# Altium PCB TSAL-LED_STRING.PcbDoc
Units mil, origin at the board's own origin, x right, y up, seen from the top; angles counter-clockwise.
Board outline 1870 x 850 mil, 2 copper layers (Top Layer, Bottom Layer); 9 components, 10 nets, 50 pads, 0 vias.
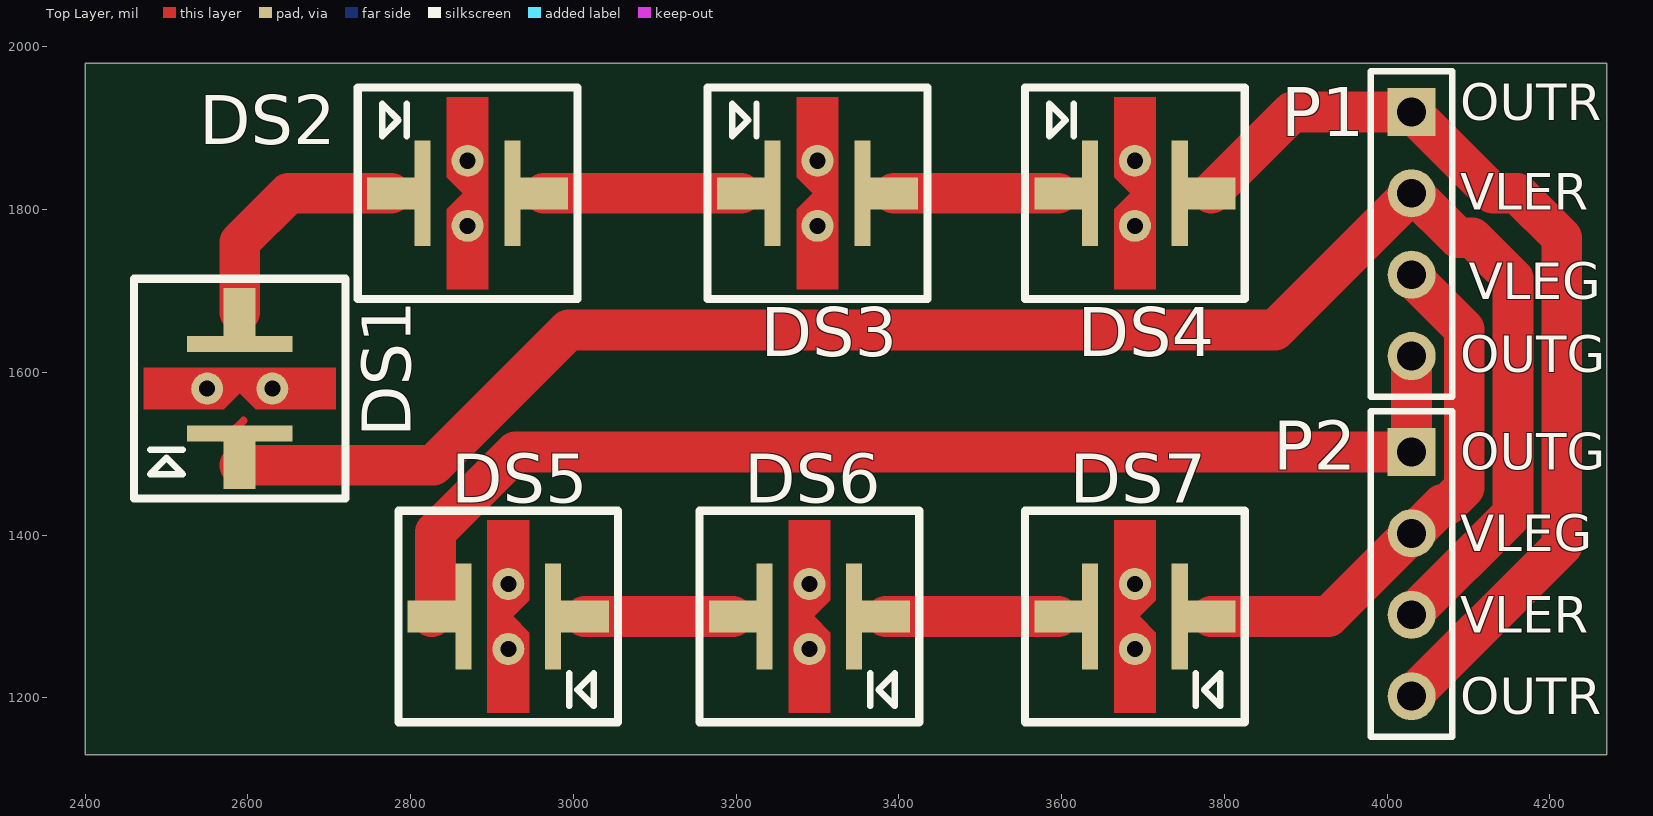
[diagram p0: Top Layer view]
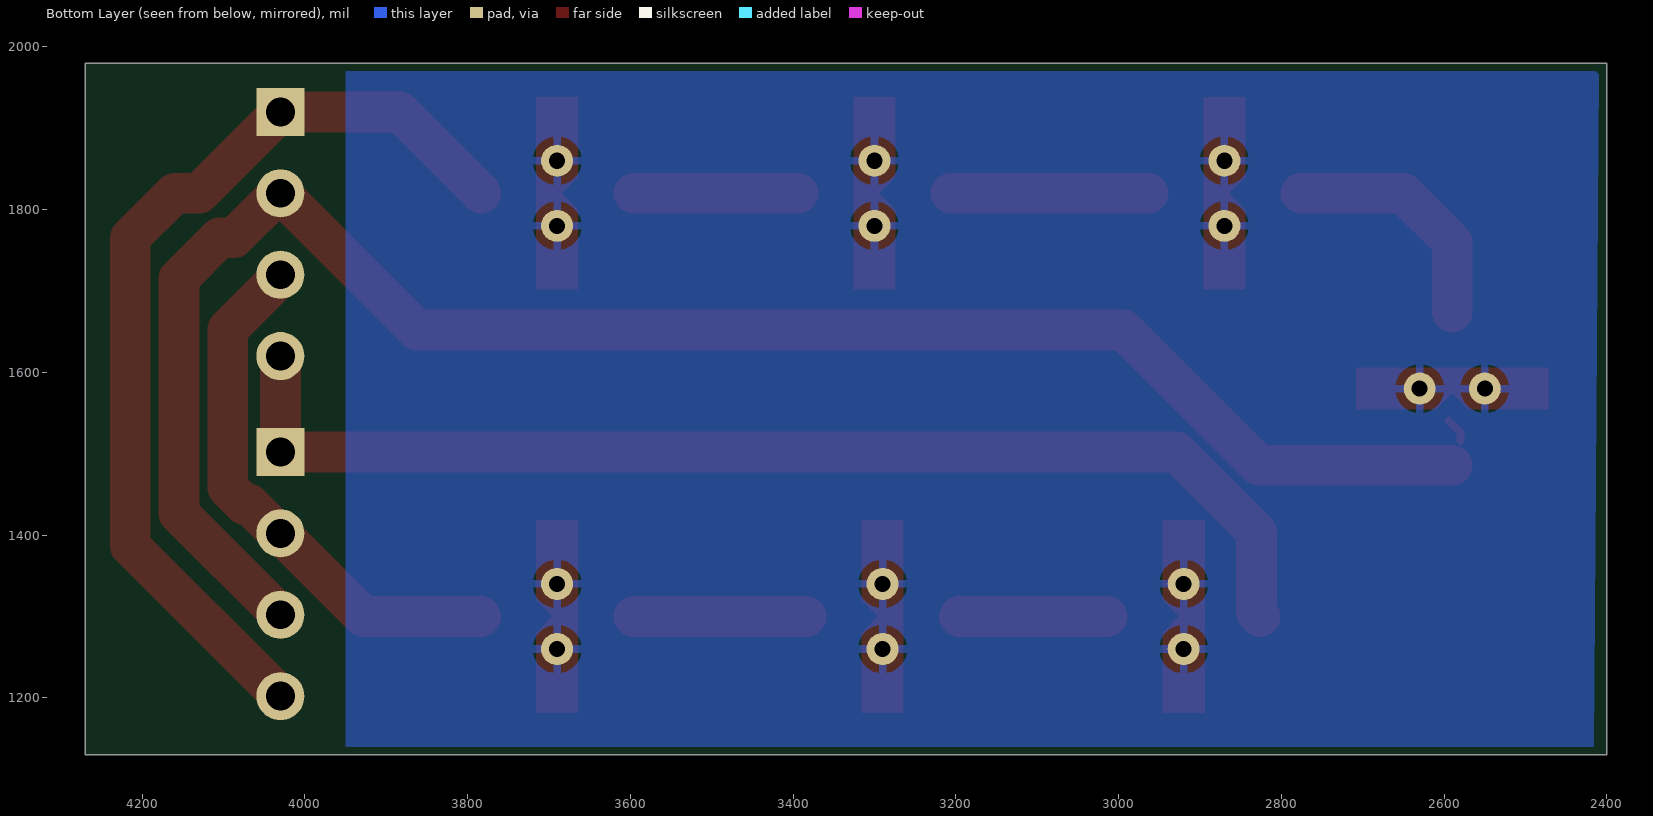
[diagram p1: Bottom Layer view, seen from below]
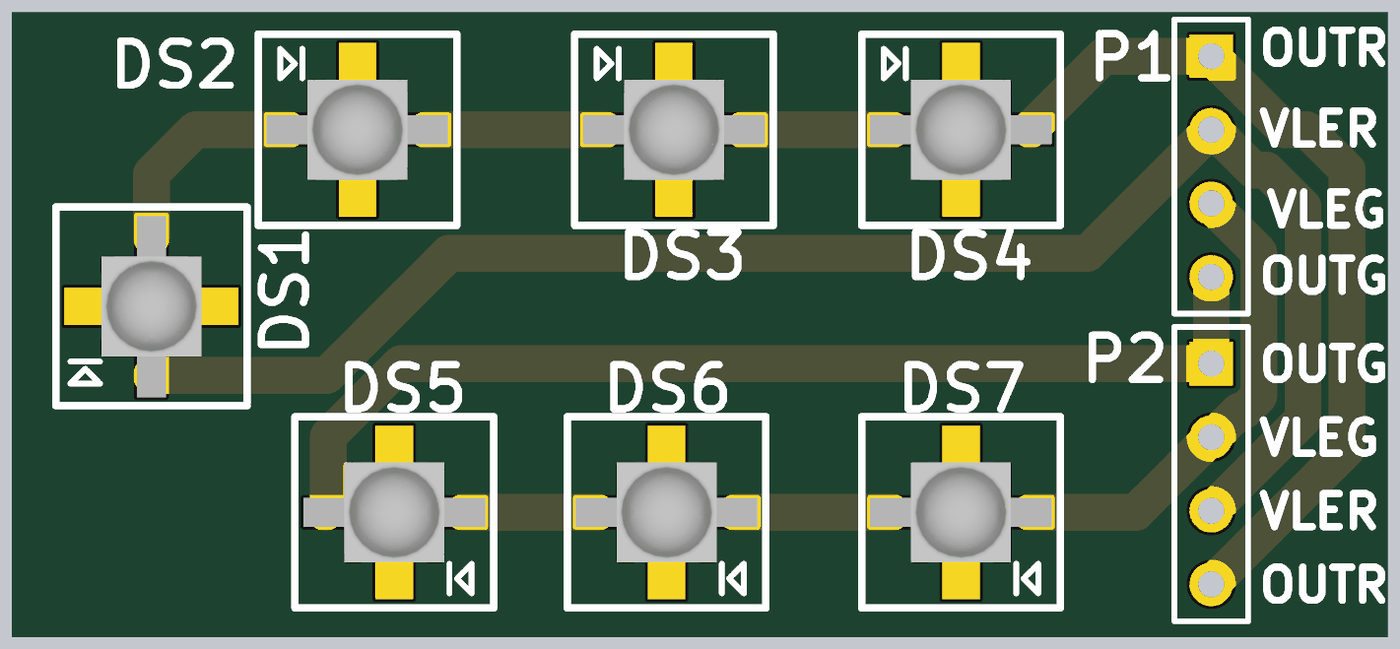
[diagram p2: 3D render of the assembled board from above, using the file's embedded part models]

## Layer stack, top to bottom
Top Solder: solder mask 0.4, Solder Resist, Dk 3.5
Top Layer: signal copper 1.4
Dielectric 1: dielectric 12.6, FR-4, Dk 4.8
Bottom Layer: signal copper 1.4
Bottom Solder: solder mask 0.4, Solder Resist, Dk 3.5

## Board outline
2400,1130 4270,1130 4270,1980 2400,1980

## Design rules (kind name [scope] priority, off if disabled: settings)
Clearance [All] p1: gap=10 ignorepadtopadclearanceinfootprint=FALSE except(0: Arc-Hole Track-Hole SMDPad-Hole THPad-Hole Via-Hole Fill-Hole Poly-Hole Region-Hole Text-Hole)
PolygonConnect [All] p1: connectstyle=Relief reliefconductorwidth=10 reliefentries=4 polygonreliefangle="90 Angle" airgapwidth=10
RoomDefinition "RED LEDs" [InComponentClass('RED LEDs')] p1: confinementstyle=ConfineIn formatcopy=TRUE lockcomponents=FALSE outline 7045,2030 8230,2030 8230,2380 7045,2380
RoomDefinition QUTMS-TSAL-LEDs [InComponentClass('QUTMS-TSAL-LEDs')] p2: confinementstyle=ConfineIn formatcopy=TRUE lockcomponents=FALSE outline 7045,1460 7165,1460 7165,1980 7045,1980
RoomDefinition "GREEN LEDs" [InComponentClass('GREEN LEDs')] p3: confinementstyle=ConfineIn formatcopy=TRUE lockcomponents=FALSE outline 7045,1060 7925,1060 7925,1410 7045,1410
RoutingVias [All] p1: holewidth=28 width=50 viastyle="Through Hole" minholewidth=28 minwidth=50 maxholewidth=28 maxwidth=50
SolderMaskExpansion [All] p1: expansion=4 istentingtop=FALSE
Width [All] p1: maxlimit=50 minlimit=10 preferedwidth=10 bottomlayer_maxwidth=10 minimp=50.000000 maximp=50.000000 favimp=50.000000
30 further rules are at their usual default settings.

## Classes and differential pairs
component class "RED LEDs": DS1 DS2 DS3 DS4
component class QUTMS-TSAL-LEDs: P1 P2
component class "GREEN LEDs": DS5 DS6 DS7

## Components (designator, comment, footprint, x,y, rotation, side; value= is the part's Value field where it differs from the comment)
DS1 "XPERED-L1-R250-00401" "Cree XLamp XP-E2 (red and green LED)" 2590,1580 r90 top
DS2 "XPERED-L1-R250-00401" "Cree XLamp XP-E2 (red and green LED)" 2870,1820 r0 top
DS3 "XPERED-L1-R250-00401" "Cree XLamp XP-E2 (red and green LED)" 3300,1820 r0 top
DS4 "XPERED-L1-R250-00401" "Cree XLamp XP-E2 (red and green LED)" 3690,1820 r0 top
DS5 "XPEGRN-L1-0000-00B01" "Cree XLamp XP-E2 (red and green LED)" 2920,1300 r180 top
DS6 "XPEGRN-L1-0000-00B01" "Cree XLamp XP-E2 (red and green LED)" 3290,1300 r180 top
DS7 "XPEGRN-L1-0000-00B01" "Cree XLamp XP-E2 (red and green LED)" 3690,1300 r180 top
P1 "Header 4" HDR1X4 4030,1920 r270 top
P2 "Header 4" HDR1X4 4030,1502.12 r270 top

## Footprints (in the part's own frame and the unit in brackets; to place one, negate y for a bottom-side part, rotate by r counter-clockwise, add the part's x,y. Pads: shape width x height; smd on the part's side, far side on the other; paste and mask are expansions set on the pad)
"Cree XLamp XP-E2 (red and green LED)" [mm]
  rect 1.5x1 smd: A(-2.388,0) K(2.388,0)
  rect 0.5x3.3 smd: A(-1.4,0) K(1.4,0)
  round 1 hole 0.5: HS(0,1.016) HS(0,-1.016)
  Top Layer region: -0.65,3 0.65,3 0.65,-3 -0.65,-3 -0.65,-0.5 -0.15,0 -0.65,0.5
  silkscreen extent -3.43,-3.3 3.43,3.3, body extent -1.73,-1.72 1.72,1.73, height 2.31
HDR1X4 [mm] "Connector; Header; 4 Position"
  rect 1.5x1.5 hole 0.9: 1(0,0)
  round 1.5 hole 0.9: 2(2.54,0) 3(5.08,0) 4(7.62,0)
  silkscreen extent -1.27,-1.27 8.89,1.27

## Part data
DS1 DS2 DS3 DS4: library part XPEBRD-L1-0000-00601, "LED, Cree XLamp XP-E2 Series, Red, 630 nm, 130 °, 62 lm, 1 A", ComponentLink1Description=Element14, ComponentLink1URL=https://au.element14.com/cree/xpebrd-l1-0000-00601/led-smd-xlamp-xpe-e-red-62lm/dp/2335107
DS5 DS6 DS7: library part XPEBGR-L1-0000-00A01, "LED, Cree XLamp XP-E2 Series, Green, 535 nm, 135 °, 87.4 lm, 1 A", ComponentLink1Description=Element14, ComponentLink1URL=https://au.element14.com/cree/xpebrd-l1-0000-00601/led-smd-xlamp-xpe-e-red-62lm/dp/2335107
P1 P2: "Header, 4-Pin", LatestRevisionDate=17-Jul-2002, LatestRevisionNote="Re-released for DXP Platform.", Publisher="Altium Limited"

## Nets (pads, with @x,y where several pads share a name; then routed paths per layer and width w, separated by ;. In a path a pad name is that pad's centre, name@x,y a point inside that pad or via, vN(x,y) a via of type N, cw(c..) or ccw(c..) an arc to the next point about the centre after c; other vN are vias at no path point)
GND: DS1.HS DS2.HS DS3.HS DS4.HS DS5.HS DS6.HS DS7.HS
NetDS1_K: DS1.K DS2.A | length 296.9
  Top Layer w50: DS1.K@2590,1674 2590,1760 2650,1820 DS2.A@2776,1820
NetDS2_K: DS2.K DS3.A | length 242
  Top Layer w50: DS2.K@2964,1820 DS3.A@3206,1820
NetDS3_K: DS3.K DS4.A | length 202
  Top Layer w50: DS3.K@3394,1820 DS4.A@3596,1820
NetDS5_A: DS5.A DS6.K | length 182
  Top Layer w50: DS5.A@3014,1300 DS6.K@3196,1300
NetDS6_A: DS6.A DS7.K | length 212
  Top Layer w50: DS6.A@3384,1300 DS7.K@3596,1300
"VLED GRN": DS7.A P1.3 P2.2 | length 675.4
  Top Layer w10: P1.3 P1.3@4037.5,1712.5 ; 4079.57,1443.4 4079.7,1443.27
  Top Layer w50: DS7.A@3784,1300 3927.88,1300 P2.2 4032.45,1402.12 4067.92,1437.59 4074.03,1437.59 4079.7,1443.27 4094.53,1458.09 4094.53,1653.02 4030,1717.55 P1.3
"VLED RED": DS1.A P1.2 P2.3 | length 2241.7
  Top Layer w10: DS1.A@2580,1516 2580,1525.84 2594.69,1540.53
  Top Layer w50: DS1.A@2590,1486 2827.95,1486 2994.08,1652.13 3862.13,1652.13 P1.2 4032.45,1820 4087.09,1765.36 4104.64,1765.36 4154.53,1715.47 4154.53,1426.64 P2.3
"VOUT GRN": DS5.K P1.4 P2.1 | length 1463.7
  Top Layer w50: DS5.K@2826,1300 2830.53,1304.53 2830.53,1403.73 2928.92,1502.12 P2.1 P1.4
"VOUT RED": DS4.K P1.1 P2.4 | length 1176.2
  Top Layer w50: DS4.K@3784,1820 3784,1820.79 3883.21,1920 P1.1 4130,1820 4160,1820 4214.53,1765.47 4214.53,1386.64 P2.4

## Polygon pours and split planes (outlines as drawn)
GND on Bottom Layer "GND_L02_P000" (solid, pour order 0): 2410,1970 3950,1970 3950,1140 2415.9,1140

## Silkscreen, mask and mechanical layers (free items; w line width, h text height)
Top Overlay:
  text "OUTR" at 4090,1910 h45
  text "VLER" at 4090,1800 h45
  text "VLEG" at 4100,1690 h45
  text "OUTG" at 4090,1600 h45
  text "OUTG" at 4090,1480 h45
  text "VLEG" at 4090,1380 h45
  text "VLER" at 4090,1280 h45
  text "OUTR" at 4090,1180 h45
Mechanical 1:
  the board outline again, w0